# Altium PCB Marvin_PCB.PcbDoc
Units mm, origin at the board's own origin, x right, y up, seen from the top; angles counter-clockwise.
Board outline 50 x 80 mm, 2 copper layers (Top Layer, Bottom Layer); 46 components, 41 nets, 180 pads, 4 vias.
Unrouted connection lines stored in the file: 96.
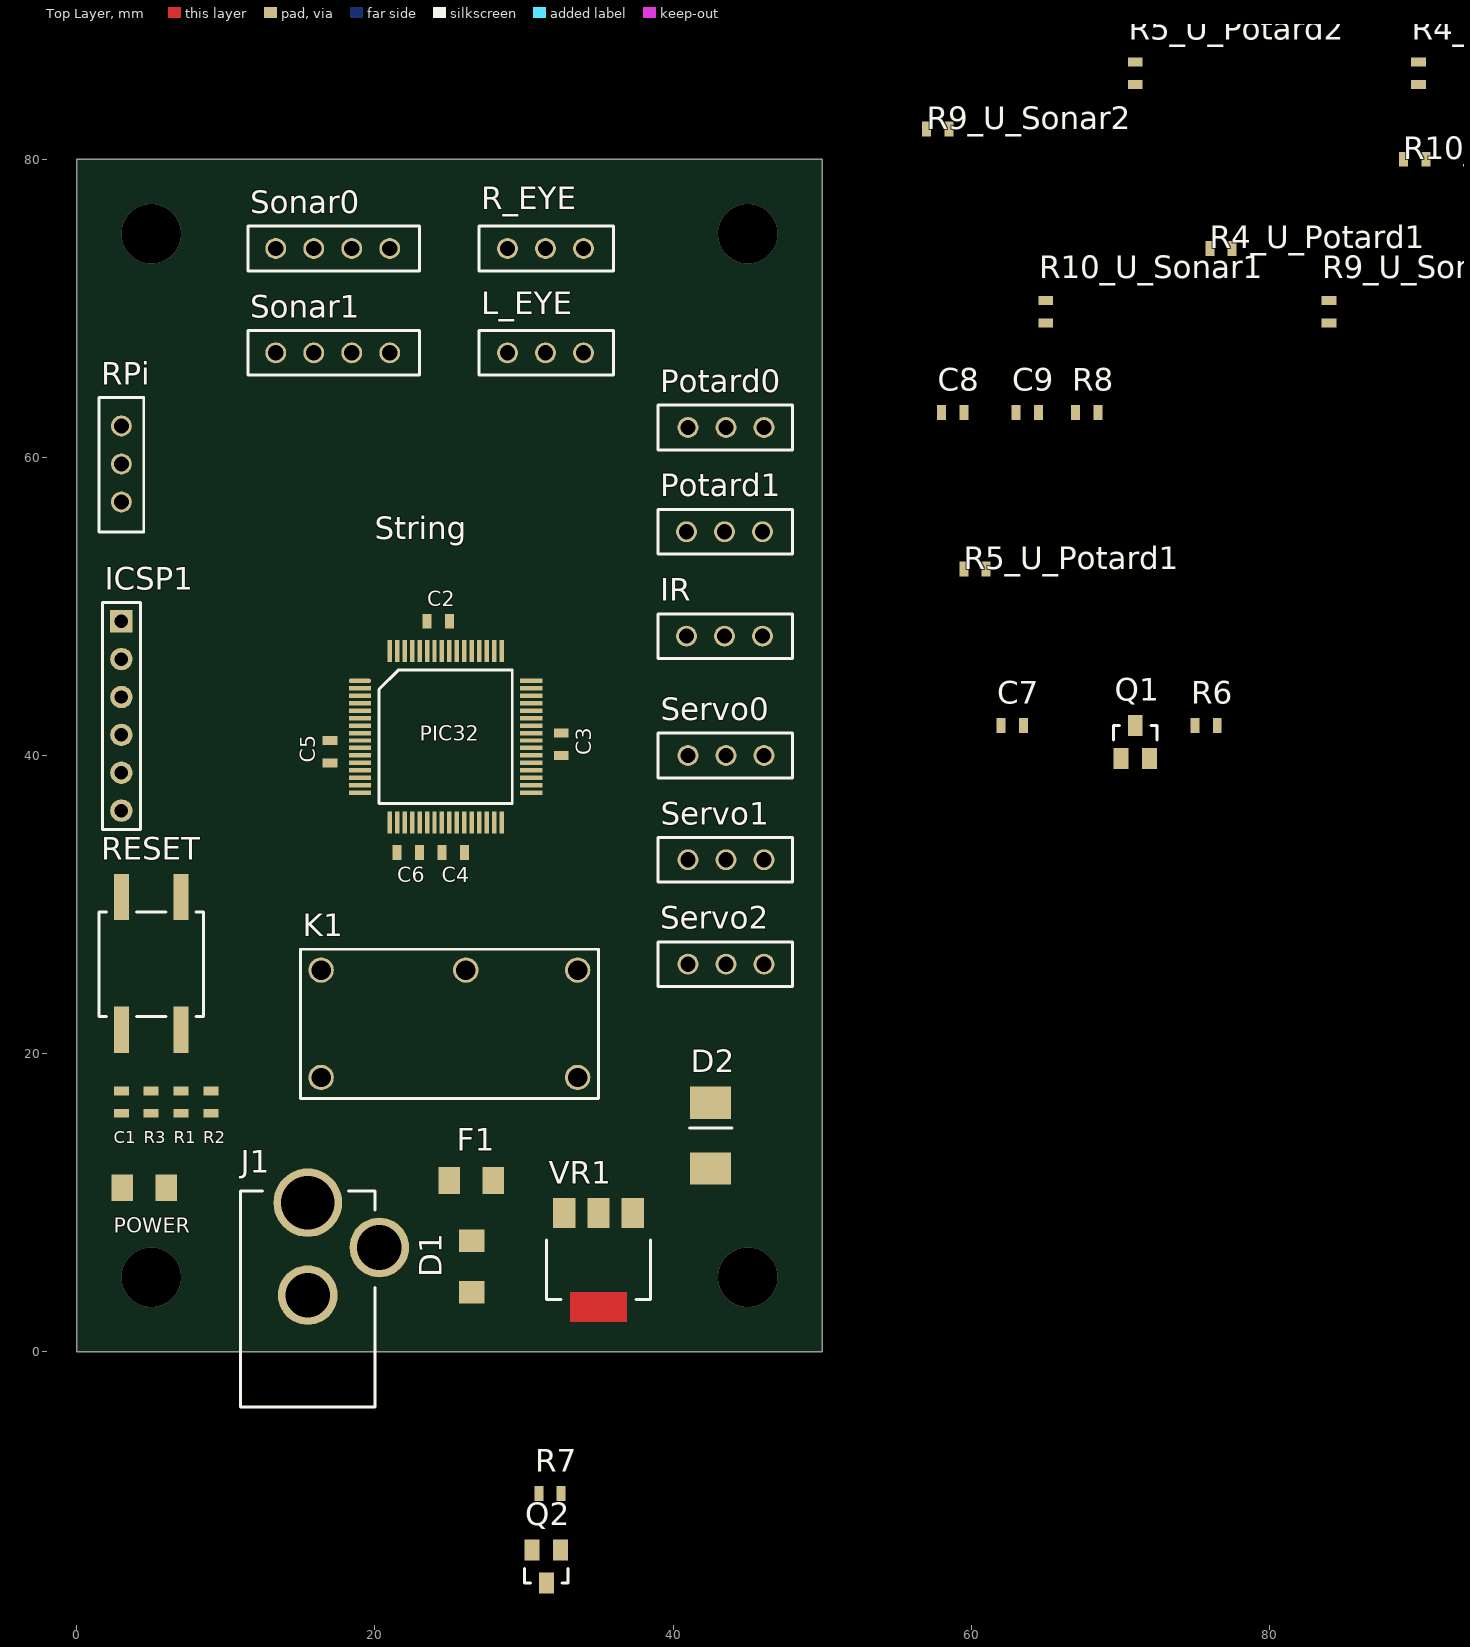
[diagram p0: Top Layer view]
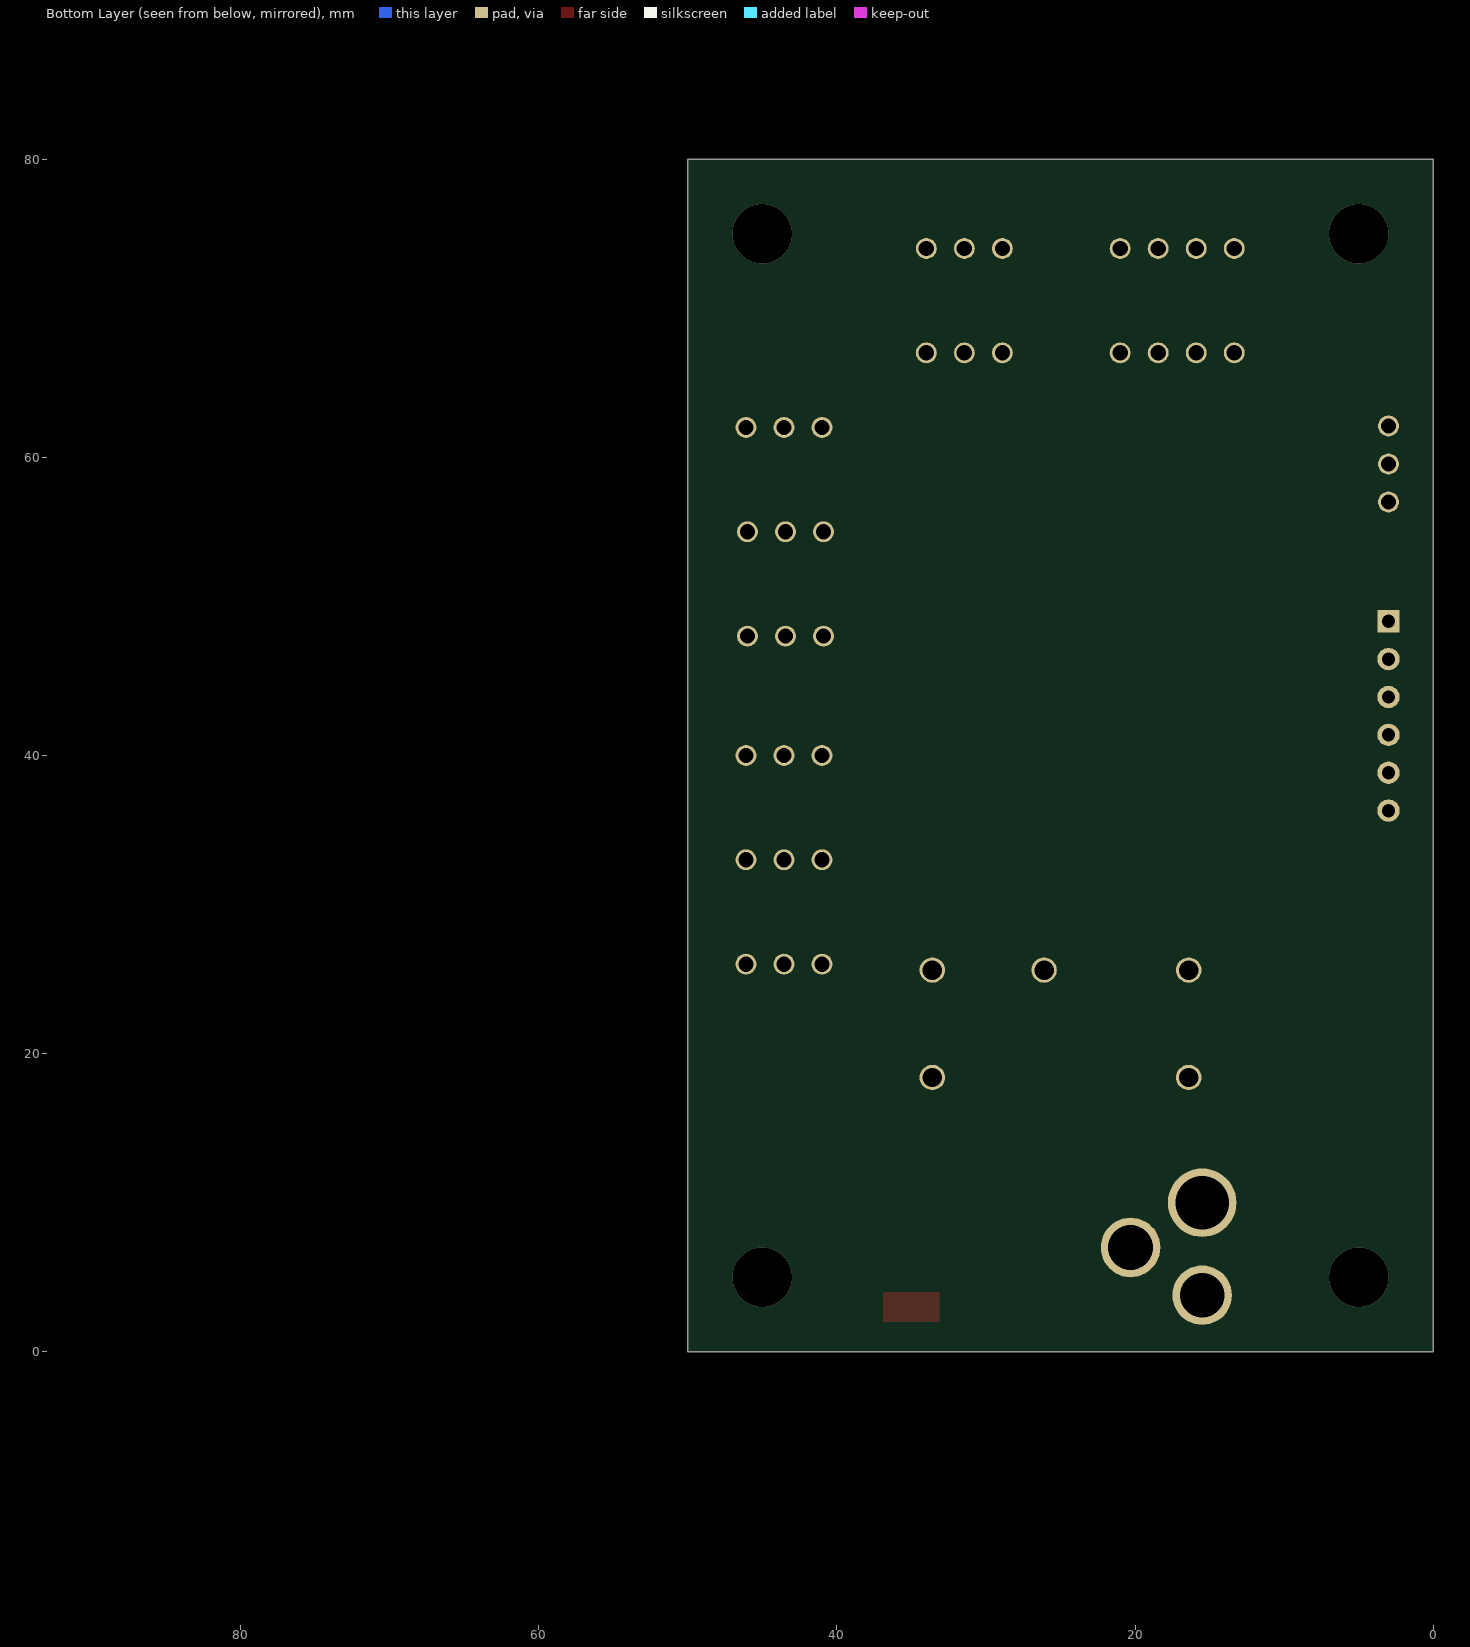
[diagram p1: Bottom Layer view, seen from below]

## Layer stack, top to bottom
Top Solder: solder mask 0.0102, Solder Resist, Dk 3.5
Top Layer: signal copper 0.0356
Dielectric 1: dielectric 0.32, FR-4, Dk 4.8
Bottom Layer: signal copper 0.0356
Bottom Solder: solder mask 0.0102, Solder Resist, Dk 3.5

## Board outline
0,0 50,0 50,80 0,80

## Design rules (kind name [scope] priority, off if disabled: settings)
Clearance [All] p1: gap=0.2
HoleSize [All] p1: absolutevalues=TRUE maxlimit=5 minlimit=0.3 maxpercent=80.000 minpercent=20.000
PolygonConnect [All] p1: connectstyle=Relief reliefconductorwidth=0.254 reliefentries=4 polygonreliefangle="90 Angle" airgapwidth=0.254
RoutingVias [All] p1: holewidth=0.3 width=0.7 viastyle="Through Hole" minholewidth=0.3 minwidth=0.7 maxholewidth=1 maxwidth=1.2
SolderMaskExpansion [All] p1: expansion=0.102
UnpouredPolygon [All] p1: allowunpoured=FALSE
Width [All] p1: maxlimit=0.5 minlimit=0.2 preferedwidth=0.2
28 further rules are at their usual default settings.

## Classes and differential pairs
component class U_IrSensor: IR
component class U_LED_V31: L_EYE
component class U_LED_V32: L_EYE
component class U_PIC: C1 C2 C3 C4 C5 C6 ICSP1 PIC1 PIC32 R1 R2 R3 RESET
component class U_Potard1: Potard0 R4_U_Potard1 R5_U_Potard1
component class U_Potard2: Potard1 R4_U_Potard2 R5_U_Potard2
component class U_Power_v2: C7 D1 K1 Q1 Q2 R6 R7
component class U_Regul: C8 C9 D2 F1 J1 POWER R8 VR1
component class U_RPI: RPi
component class U_Servo1: Servo0
component class U_Servo2: Servo1
component class U_Servo3: Servo2
component class U_Sonar1: R9_U_Sonar1 R10_U_Sonar1 Sonar0
component class U_Sonar2: R9_U_Sonar2 R10_U_Sonar2 Sonar1
channel class LED_V3: U_LED_V31 U_LED_V32
channel class Potard: U_Potard1 U_Potard2
channel class Servo: U_Servo1 U_Servo2 U_Servo3
channel class Sonar: U_Sonar1 U_Sonar2

## Components (designator, comment, footprint, x,y, rotation, side; value= is the part's Value field where it differs from the comment)
C1 "Cap" "1608 / 0603" 3,16 r90 top
C2 "Cap" "1608 / 0603" 23.5,49 r0 top
C3 "Cap" "1608 / 0603" 32.5,41.5 r270 top
C4 "Cap" "1608 / 0603" 24.5,33.5 r0 top
C5 "Cap" "1608 / 0603" 17,41 r270 top
C6 "Cap" "1608 / 0603" 23,33.5 r180 top
C7 "Cap" "1608 / 0603" 62,42 r0 top
C8 "Cap" "1608 / 0603" 58,63 r0 top
C9 "Cap" "1608 / 0603" 63,63 r0 top
D1 "Diode GF1A" SMA/DO-214AC_21 26.5,4 r90 top
D2 "D Zener 1N5338BRLG" "DIODE ZENER" 42.5,14.5 r90 top
F1 "MCPFP 5A 125V" "3216 / 1206" 25,11.5 r0 top
ICSP1 "" HDR1X6 3,49 r270 top
IR "IR_Connector" "IR SENSOR CONNECTOR" 46,48 r180 top (schematic designator IR1)
J1 "PWR2.5" RAPC712BK 15.5,10 r0 top
K1 "Relay-SPDT G5V-1" PE014005 25,22 r0 top
L_EYE "Leds_Connector" "LEDS CONNECTOR" 34,67 r180 top (schematic designator LED1)
PIC32 "PIC32MX340F512H" PIC32MX340F512H 19,45 r0 top (schematic designator PIC1)
Potard0 "Potard_Connector" "POTARD CONNECTOR" 41,62 r0 top (schematic designator Pot1)
Potard1 "Potard_Connector" "POTARD CONNECTOR" 46,55 r180 top (schematic designator Pot1)
POWER "" "3216 / 1206" 6,11 r180 top (schematic designator 1)
Q1 "MOSFET-P ZVP2106A" SOT23 71,42 r0 top
Q2 "MOSFET-N 2N7002K" SOT23 31.5,-15.5 r180 top
R1 "Res1" "1608 / 0603" 7,17.5 r270 top
R2 "Res1" "1608 / 0603" 9,17.5 r270 top
R3 "0r" "1608 / 0603" 5,16 r90 top
R4_U_Potard1 "Res1" "1608 / 0603" 76,74 r0 top (schematic designator R4)
R4_U_Potard2 "Res1" "1608 / 0603" 90,85 r90 top (schematic designator R4)
R5_U_Potard1 "Res1" "1608 / 0603" 59.5,52.5 r0 top (schematic designator R5)
R5_U_Potard2 "Res1" "1608 / 0603" 71,85 r90 top (schematic designator R5)
R6 "Res1" "1608 / 0603" 75,42 r0 top
R7 "Res1" "1608 / 0603" 31,-9.5 r0 top
R8 "Res1" "1608 / 0603" 67,63 r0 top
R9_U_Sonar1 "Res1" "1608 / 0603" 84,69 r90 top (schematic designator R9)
R9_U_Sonar2 "Res1" "1608 / 0603" 57,82 r0 top (schematic designator R9)
R10_U_Sonar1 "Res1" "1608 / 0603" 65,69 r90 top (schematic designator R10)
R10_U_Sonar2 "Res1" "1608 / 0603" 88.987,79.987 r0 top (schematic designator R10)
R_EYE "Leds_Connector" "LEDS CONNECTOR" 34,74 r180 top (schematic designator LED1)
RESET "SW-PB" GULLWING 7,30.5 r270 top (schematic designator RESET1)
RPi "RPi_Connector" "RPI CONNECTOR" 3,57 r90 top (schematic designator RPi1)
Servo0 "Servo_Connector" "SERVO CONNECTOR" 41,40 r0 top (schematic designator Servo1)
Servo1 "Servo_Connector" "SERVO CONNECTOR" 41,33 r0 top
Servo2 "Servo_Connector" "SERVO CONNECTOR" 41,26 r0 top (schematic designator Servo1)
Sonar0 "Sonar_Connector" "SONAR CONNECTOR" 21,74 r180 top (schematic designator Sonar1)
Sonar1 "Sonar_Connector" "SONAR CONNECTOR" 21,67 r180 top
VR1 "Regul LD1117S33TR" SOT-223 35,3 r180 top

## Footprints (in the part's own frame and the unit in brackets; to place one, negate y for a bottom-side part, rotate by r counter-clockwise, add the part's x,y. Pads: shape width x height; smd on the part's side, far side on the other; paste and mask are expansions set on the pad)
"1608 / 0603" [mm] "0603"
  rect 0.6x1 smd mask+0.2: 1(0,0) 2(1.5,0)
"3216 / 1206" [mm]
  rect 1.45x1.8 smd mask+0.2: 1(0,0) 2(2.95,0)
"DIODE ZENER" [mm]
  rect 2.159x2.743 smd mask+0.2: 1(-2.21,0) 2(2.21,0)
  silkscreen extent 0.51,-1.45 0.51,1.4
GULLWING [mm]
  rect 3.1x1 smd mask+0.2: 1(0,0) 1(0,-4) 2(8.9,0) 2(8.9,-4)
  silkscreen extent 1,-5.5 8,1.5
HDR1X6 [mm] "Connector; Header; 6 Position"
  rect 1.5x1.5 hole 0.9: 1(0,0)
  round 1.5 hole 0.9: 2(2.54,0) 3(5.08,0) 4(7.62,0) 5(10.16,0) 6(12.7,0)
  silkscreen extent -1.27,-1.27 13.97,1.27
"IR SENSOR CONNECTOR" [mm]
  round 1.4 hole 1.02 mask+0.2: 1(0,0) 2(2.55,0) 3(5.1,0)
  silkscreen extent -2,-1.5 7,1.5
"LEDS CONNECTOR" [mm]
  round 1.4 hole 1.02 mask+0.2: 1(0,0) 2(2.55,0) 3(5.1,0)
  silkscreen extent -2,-1.5 7,1.5
PE014005 [mm] "RELAIS PE014005"
  round 1.7 hole 1.3 mask+0.2: 11(1.1,3.6) 12(8.6,-3.6) 14(8.6,3.6) A1(-8.6,3.6) A2(-8.6,-3.6)
  silkscreen extent -10,-5 10,5
PIC32MX340F512H [mm]
  oval 1.5x0.3 smd mask+0.2: 1(0,0)
  rect 1.5x0.3 smd mask+0.2: 2(0,-0.5) 3(0,-1) 4(0,-1.5) 5(0,-2) 6(0,-2.5) 7(0,-3) 8(0,-3.5) 9(0,-4) 10(0,-4.5) 11(0,-5) 12(0,-5.5) 13(0,-6) 14(0,-6.5) 15(0,-7) 16(0,-7.5) 33(11.5,-7.5) 34(11.5,-7) 35(11.5,-6.5) 36(11.5,-6) 37(11.5,-5.5) 38(11.5,-5) 39(11.5,-4.5) 40(11.5,-4) 41(11.5,-3.5) 42(11.5,-3) 43(11.5,-2.5) 44(11.5,-2) 45(11.5,-1.5) 46(11.5,-1) 47(11.5,-0.5) 48(11.5,0)
  rect 0.3x1.5 smd mask+0.2: 17(2,-9.5) 18(2.5,-9.5) 19(3,-9.5) 20(3.5,-9.5) 21(4,-9.5) 22(4.5,-9.5) 23(5,-9.5) 24(5.5,-9.5) 25(6,-9.5) 26(6.5,-9.5) 27(7,-9.5) 28(7.5,-9.5) 29(8,-9.5) 30(8.5,-9.5) 31(9,-9.5) 32(9.5,-9.5) 49(9.5,2) 50(9,2) 51(8.5,2) 52(8,2) 53(7.5,2) 54(7,2) 55(6.5,2) 56(6,2) 57(5.5,2) 58(5,2) 59(4.5,2) 60(4,2) 61(3.5,2) 62(3,2) 63(2.5,2) 64(2,2)
  silkscreen extent 1.28,-8.21 10.21,0.72
"POTARD CONNECTOR" [mm]
  round 1.4 hole 1.02 mask+0.2: 1(0,0) 2(2.55,0) 3(5.1,0)
  silkscreen extent -2,-1.5 7,1.5
RAPC712BK [mm] "PRISE JACK RAPC712BK"
  round 4.6 hole 3.6 mask+0.2: 1(0,0)
  round 4 hole 3 mask+0.2: 2(0,-6.2) 3(4.8,-3)
  silkscreen extent -4.5,-13.7 4.5,0.8
"RPI CONNECTOR" [mm]
  round 1.4 hole 1.02 mask+0.2: 1(0,0) 2(2.55,0) 3(5.1,0)
  silkscreen extent -2,-1.5 7,1.5
"SERVO CONNECTOR" [mm]
  round 1.4 hole 1.02 mask+0.2: 1(0,0) 2(2.55,0) 3(5.1,0)
  silkscreen extent -2,-1.5 7,1.5
SMA/DO-214AC_21 [mm]
  rect 1.52x1.68 smd mask+0.2: 1(0,0) 2(3.45,0)
"SONAR CONNECTOR" [mm]
  round 1.4 hole 1.02 mask+0.2: 1(0,0) 2(2.55,0) 3(5.1,0) 4(7.65,0)
  silkscreen extent -2,-1.5 9.5,1.5
SOT23 [mm] "MOSFET N 2N7002K"
  rect 1x1.4 smd mask+0.2: 1(-0.95,-2.2) 2(0.95,-2.2) 3(0,0)
  silkscreen extent -1.46,-0.97 1.46,0
SOT-223 [mm] "LD1117S33TR"
  rect 1.5x2 smd mask+0.2: 1(-2.3,-6.3) 2(0,-6.3) 3(2.3,-6.3)
  Top Layer region: -1.9,-1 1.9,-1 1.9,1 -1.9,1
  silkscreen extent -3.5,-4.5 3.5,-0.5

## Part data
C1 C2 C3 C4 C5 C6 C7 C8 C9: "Capacitor"
D1: library part Diode, "Default Diode"
D2: library part "D Zener", "Zener Diode"
F1: library part "Fuse 1", "Fuse"
ICSP1: library part "Header 6", "Header, 6-Pin"
J1: "Low Voltage Power Supply Connector"
K1: library part Relay-SPDT, "Single-Pole Dual-Throw Relay"
POWER: library part LED0, "Typical INFRARED GaAs LED"
Q1: library part MOSFET-P, "P-Channel MOSFET"
Q2: library part MOSFET-N, "N-Channel MOSFET"
R1 R2 R4_U_Potard1 R4_U_Potard2 R5_U_Potard1 R5_U_Potard2 R6 R7 R8 R9_U_Sonar1 R9_U_Sonar2 R10_U_Sonar1 R10_U_Sonar2: "Resistor"
R3: library part Res1, "Resistor"
RESET: "Switch"
VR1: library part "Volt Reg", "Voltage Regulator"

## Via types
v1: diameter 4, hole 4, Top Layer to Bottom Layer, 4 vias

## Nets (pads, with @x,y where several pads share a name; then routed paths per layer and width w, separated by ;. In a path a pad name is that pad's centre, name@x,y a point inside that pad or via, vN(x,y) a via of type N, cw(c..) or ccw(c..) an arc to the next point about the centre after c; other vN are vias at no path point)
3V3MAIN: C6.2 C8.2 C9.2 ICSP1.2 PIC32.19 R1.2 R8.2 VR1.3
5VIN: F1.1 J1.1
5VMAIN: D1.2 D2.2 F1.2 L_EYE.2 Q1.3 R4_U_Potard1.2 R4_U_Potard2.2 R6.2 R_EYE.2 VR1.1
GND: C2.1 C6.1 C7.1 C8.1 C9.1 D2.1 ICSP1.3 IR.1 J1.2 L_EYE.1 PIC32.20 Potard0.1 Potard1.1 POWER.2 Q2.2 R3.1 R7.1 R9_U_Sonar1.1 R9_U_Sonar2.1 R10_U_Sonar1.1 R10_U_Sonar2.1 R_EYE.1 RESET.1 RPi.3 Servo0.1 Servo1.1 Servo2.1 Sonar0.4 Sonar1.4 VR1.2
"LED DIM 0": L_EYE.3 PIC32.51
"LED DIM 1": PIC32.52 R_EYE.3
Net1_1: POWER.1 R8.1
NetC1_1: C1.1 R3.2
NetC1_2: C1.2 R1.1 R2.1 RESET.2
NetC2_2: C2.2 PIC32.56
NetC3_1: C3.1 PIC32.41
NetC3_2: C3.2 PIC32.10
NetC4_1: C4.1 PIC32.25
NetC4_2: C4.2 PIC32.26
NetC5_1: C5.1 PIC32.9
NetC5_2: C5.2 PIC32.38
NetD1_1: D1.1 Q2.3
NetICSP1_1: ICSP1.1 PIC32.7 R2.2
NetICSP1_4: ICSP1.4 PIC32.18
NetICSP1_5: ICSP1.5 PIC32.17
NetIR1_3: IR.3 PIC32.14
NetJ1_3: J1.3
NetPIC1_12: PIC32.12 Potard0.3
NetPIC1_13: PIC32.13 Potard1.3
NetPIC1_33: PIC32.33 RPi.2
NetPIC1_34: PIC32.34 RPi.1
NetPIC1_42: PIC32.42 R9_U_Sonar2.2 Sonar1.3
NetPIC1_43: PIC32.43 R9_U_Sonar1.2 Sonar0.3
NetPIC1_46: PIC32.46 Servo2.3
NetPIC1_49: PIC32.49 Servo1.3
NetPIC1_50: PIC32.50 Servo0.3
NetPIC1_54: PIC32.54 R10_U_Sonar2.2 Sonar1.2
NetPIC1_55: PIC32.55 R10_U_Sonar1.2 Sonar0.2
NetPIC1_60: PIC32.60 Q2.1 R7.2
NetPIC1_61: PIC32.61 Q1.2
NetPot1_U_Potard1_2: Potard0.2 R5_U_Potard1.1
NetPot1_U_Potard2_2: Potard1.2 R5_U_Potard2.1
NetR4_U_Potard1_1: R4_U_Potard1.1 R5_U_Potard1.2
NetR4_U_Potard2_1: R4_U_Potard2.1 R5_U_Potard2.2
"SENSOR VCC": IR.2 Q1.1 Sonar0.1 Sonar1.1
"SERVO VCC": C7.2 Servo0.2 Servo1.2 Servo2.2
pads on no net: ICSP1.6 K1.11 K1.12 K1.14 K1.A1 K1.A2 PIC32.1 PIC32.2 PIC32.3 PIC32.4 PIC32.5 PIC32.6 PIC32.8 PIC32.11 PIC32.15 PIC32.16 PIC32.21 PIC32.22 PIC32.23 PIC32.24 PIC32.27 PIC32.28 PIC32.29 PIC32.30 PIC32.31 PIC32.32 PIC32.35 PIC32.36 PIC32.37 PIC32.39 PIC32.40 PIC32.44 PIC32.45 PIC32.47 PIC32.48 PIC32.53 PIC32.57 PIC32.58 PIC32.59 PIC32.62 PIC32.63 PIC32.64 R6.1
copper on no net:
  other v1: 5,5 45,5 5,75 45,75

## Silkscreen, mask and mechanical layers (free items; w line width, h text height)
Top Overlay:
  text "String" at 20,54.5 h1.52
Board Outline:
  the board outline again, w0.2